# Altium PCB AT89S52单片机入门与提高.PcbDoc (part 3 of 4)
Units mm, origin at the board's own origin, x right, y up, seen from the top; angles counter-clockwise.
Board outline 152.4 x 101.6 mm, 2 copper layers (Top Layer, Bottom Layer); 111 components, 112 nets, 451 pads, 53 vias.
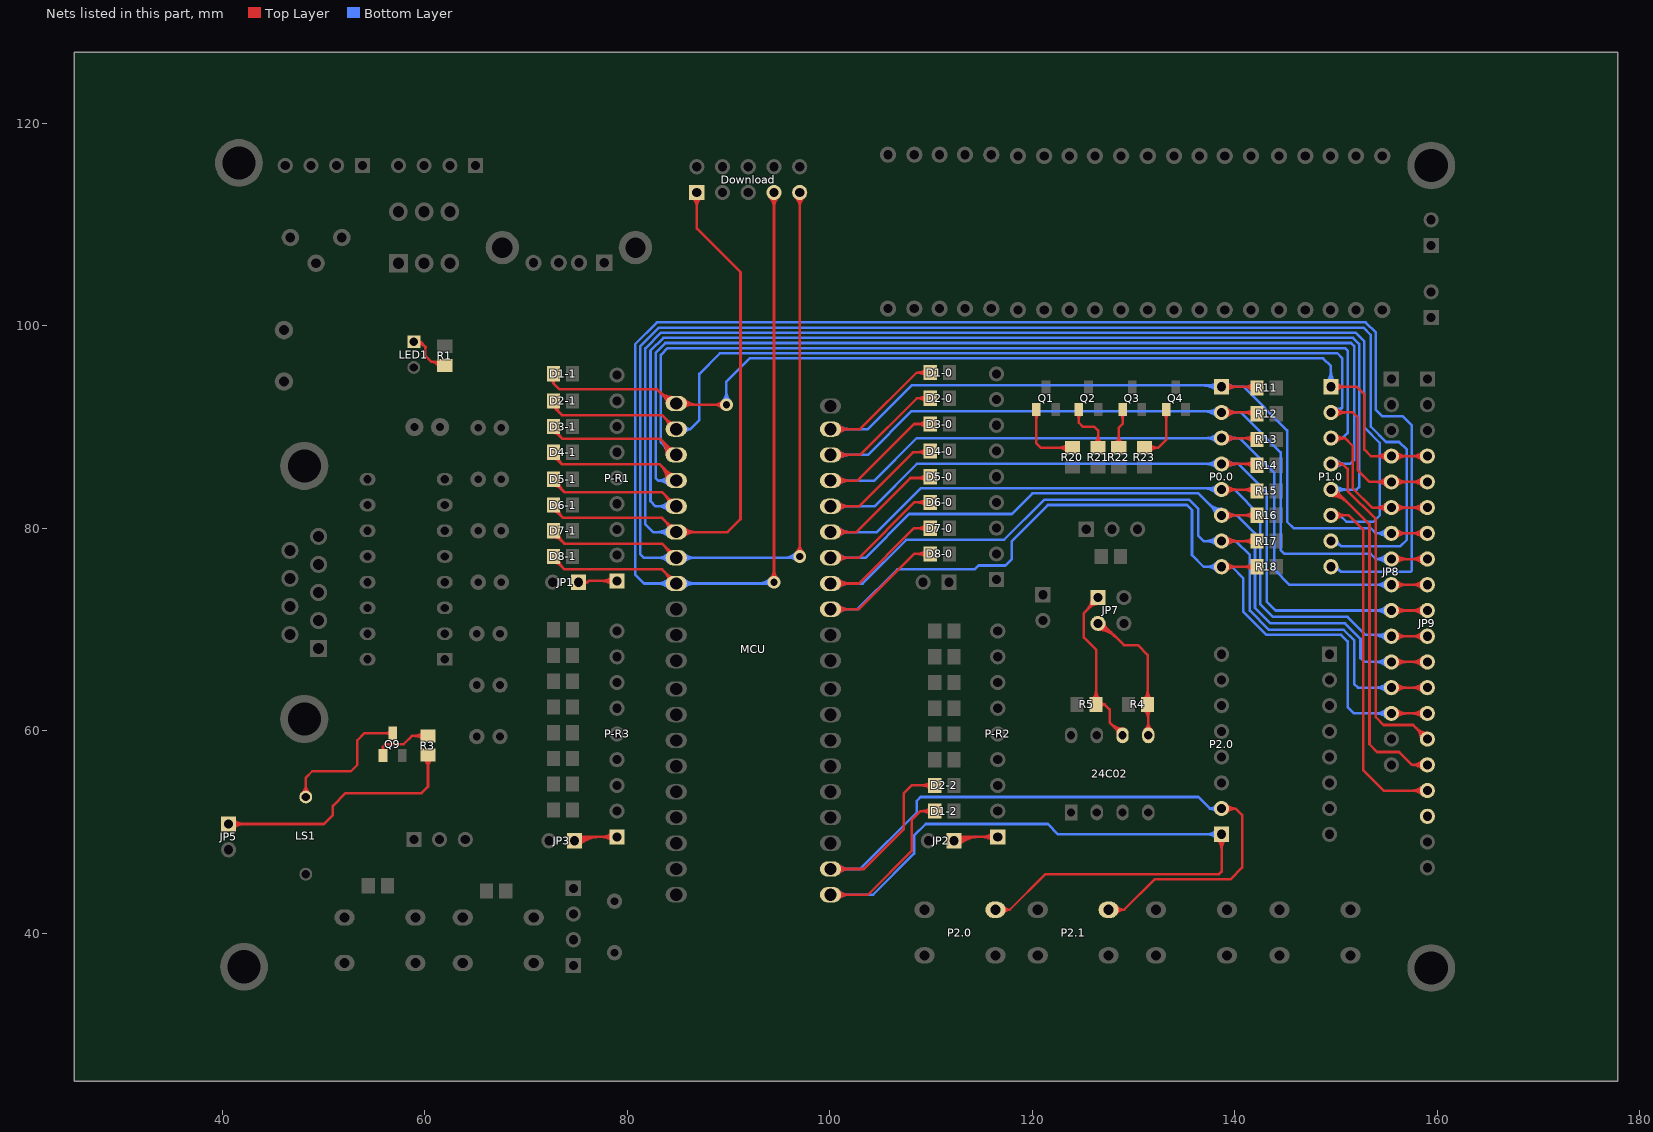
[diagram p3: the nets of this part, all layers, seen from the top]

## Via types
v1: diameter 1.27, hole 0.711, Top Layer to Bottom Layer, 53 vias

## Nets (pads, with @x,y where several pads share a name; then routed paths per layer and width w, separated by ;. In a path a pad name is that pad's centre, name@x,y a point inside that pad or via, vN(x,y) a via of type N, cw(c..) or ccw(c..) an arc to the next point about the centre after c; other vN are vias at no path point) (continued)
NetJP1_1: JP1.1 P-R1.9 | length 8.4
  Top Layer w0.254: JP1.1@75.184,74.676 76.073,74.676 ; JP1.1@75.77,74.463 cw(c76.073,74.353) 76.073,74.676 ; JP1.1@75.77,74.889 ccw(c76.073,74.999) 76.073,74.676 ; P-R1.9@78.553,74.362 ccw(c77.49,73.299) 77.49,74.803 ccw(c77.49,76.307) P-R1.9@78.553,75.244 ; P-R1.9@78.733,74.542 ccw(c78.103,73.912) 78.103,74.803 ccw(c78.103,75.694) P-R1.9@78.733,75.064 ; P-R1.9@78.994,74.803 76.2,74.803 76.073,74.676
NetJP2_1: JP2.1 P-R2.1 | length 13.4
  Top Layer w0.254: JP2.1@112.268,49.149 112.649,49.53 P-R2.1@116.586,49.53 ; JP2.1@112.349,49.068 cw(c113.465,47.952) 113.465,49.53 ; JP2.1@112.529,48.888 cw(c114.079,47.338) 114.079,49.53 ; JP2.1@112.709,48.708 cw(c114.692,46.725) 114.692,49.53 ; P-R2.1@116.145,49.089 ccw(c115.082,48.026) 115.082,49.53 ccw(c115.082,51.034) P-R2.1@116.145,49.971 ; P-R2.1@116.325,49.269 ccw(c115.695,48.639) 115.695,49.53 ccw(c115.695,50.421) P-R2.1@116.325,49.791
NetJP3_1: JP3.1 P-R3.9 | length 13.3
  Top Layer w0.254: JP3.1@74.803,49.149 75.184,49.53 P-R3.9@78.994,49.53 ; JP3.1@74.884,49.068 cw(c76,47.952) 76,49.53 ; JP3.1@75.064,48.888 cw(c76.614,47.338) 76.614,49.53 ; JP3.1@75.244,48.708 cw(c77.227,46.725) 77.227,49.53 ; P-R3.9@78.553,49.089 ccw(c77.49,48.026) 77.49,49.53 ccw(c77.49,51.034) P-R3.9@78.553,49.971 ; P-R3.9@78.733,49.269 ccw(c78.103,48.639) 78.103,49.53 ccw(c78.103,50.421) P-R3.9@78.733,49.791
NetJP6_1: JP5.1 R3.1 | length 30.6
  Top Layer w0.254: JP5.1@40.64,50.8 50.038,50.8 50.927,51.689 50.927,52.578 52.197,53.848 59.69,53.848 60.325,54.483 R3.1@60.325,57.597 ; JP5.1@40.901,50.539 cw(c41.531,49.909) 41.531,50.8 cw(c41.531,51.691) JP5.1@40.901,51.061 ; JP5.1@41.081,50.359 cw(c42.144,49.296) 42.144,50.8 cw(c42.144,52.304) JP5.1@41.081,51.241 ; R3.1@59.955,57.227 cw(c59.062,56.334) 60.325,56.334 cw(c61.588,56.334) R3.1@60.695,57.227
NetJP7_1: 24C02.6 JP7.1 R5.1 | length 25
  Top Layer w0.254: 125.339,71.872 ccw(c124.058,73.152) JP7.1@125.869,73.152 ; 125.645,72.178 cw(c126.492,71.332) JP7.1@126.492,72.529 ; 125.772,72.305 ccw(c124.926,73.152) JP7.1@126.123,73.152 ; R5.1@125.929,63.081 ccw(c125.036,63.974) 126.299,63.974 ccw(c127.562,63.974) R5.1@126.669,63.081 ; JP7.1@126.492,73.152 126.492,73.025 125.095,71.628 125.095,69.215 126.299,68.011 R5.1@126.299,62.611 127.127,62.611 ; R5.1@126.771,62.386 cw(c127.127,62.217) 127.127,62.611 ; R5.1@126.771,62.836 ccw(c127.127,63.005) 127.127,62.611 ; 127.779,60.687 ccw(c128.906,61.814) 24C02.6@128.906,60.22 ; 128.208,60.257 cw(c127.688,59.737) 24C02.6@128.423,59.737 ; 128.212,60.253 ccw(c128.906,60.947) 24C02.6@128.906,59.966 ; 24C02.6@128.906,59.559 127.635,60.83 127.635,62.103 127.127,62.611
NetJP7_3: 24C02.5 JP7.3 R4.1 | length 25.4
  Top Layer w0.254: JP7.3@126.492,69.989 cw(c126.492,67.565) 128.206,69.279 ; JP7.3@126.492,70.243 cw(c126.492,68.432) 127.772,69.713 ; JP7.3@126.492,70.497 cw(c126.492,69.3) 127.339,70.146 ; JP7.3@126.492,70.612 126.873,70.612 129.032,68.453 130.429,68.453 131.379,67.503 R4.1@131.379,62.611 131.446,62.544 24C02.5@131.446,59.559 ; JP7.3@127.115,70.612 ccw(c127.699,70.612) 127.286,70.199 ; R4.1@131.009,62.141 cw(c129.955,61.087) 131.446,61.087 ; R4.1@131.009,63.081 ccw(c130.116,63.974) 131.379,63.974 ccw(c132.642,63.974) R4.1@131.749,63.081 ; 24C02.5@131.105,60.078 ccw(c130.281,60.902) 131.446,60.902 ccw(c132.611,60.902) 24C02.5@131.787,60.078 ; R4.1@131.189,62.321 cw(c130.568,61.7) 131.446,61.7 ; 131.446,61.41 cw(c132.48,61.41) R4.1@131.749,62.141
NetJP9_18: JP9.18
NetLED1_1: LED1.1 R1.2 | length 9.2
  Top Layer w0.254: LED1.1@58.999,98.181 cw(c59.307,97.125) 60.085,97.903 ; 59.782,98.206 ccw(c59.17,97.595) LED1.1@58.928,98.425 59.563,98.425 60.071,97.917 60.071,97.028 60.64,96.459 ; 60.987,96.459 cw(c60.987,95.795) R1.2@61.62,95.996 ; R1.2@61.335,96.459 cw(c61.335,95.906) R1.2@61.862,96.073 ; R1.2@61.378,95.92 ccw(c60.64,95.685) 60.64,96.459 ; R1.2@61.976,96.078 61.595,96.459 60.64,96.459
NetLS1_1: LS1.1 Q9.3 | length 16.8
  Top Layer w0.254: LS1.1@47.901,53.826 ccw(c47.034,54.693) 48.26,54.693 ccw(c49.486,54.693) LS1.1@48.619,53.826 ; LS1.1@48.26,53.467 48.26,55.372 48.895,56.007 52.705,56.007 53.34,56.642 53.34,59.055 54.049,59.764 Q9.3@56.835,59.764 ; Q9.3@56.624,59.553 ccw(c56.115,59.045) 56.115,59.764 ccw(c56.115,60.484) Q9.3@56.624,59.975
NetQ1_1: Q1.1 R20.2 | length 10.2
  Top Layer w0.254: Q1.1@120.19,91.291 cw(c119.681,90.783) 120.401,90.783 cw(c121.12,90.783) Q1.1@120.611,91.291 ; Q1.1@120.401,91.727 120.401,88.387 120.843,87.945 R20.2@123.952,87.945 ; R20.2@123.482,87.575 ccw(c122.589,86.682) 122.589,87.945 ccw(c122.589,89.208) R20.2@123.482,88.315
NetQ2_1: Q2.1 R21.2 | length 8.4
  Top Layer w0.254: Q2.1@124.381,91.291 cw(c123.872,90.783) 124.592,90.783 cw(c125.311,90.783) Q2.1@124.802,91.291 ; Q2.1@124.592,91.727 124.592,90.419 124.968,90.043 126.111,90.043 126.492,89.662 R21.2@126.492,87.945 ; R21.2@126.122,88.315 ccw(c125.229,89.208) 126.492,89.208 ccw(c127.755,89.208) R21.2@126.862,88.315
NetQ3_1: Q3.1 R22.2 | length 7.1
  Top Layer w0.254: R22.2@128.154,88.315 ccw(c127.261,89.208) 128.524,89.208 ccw(c129.787,89.208) R22.2@128.894,88.315 ; R22.2@128.524,87.945 128.524,89.916 128.91,90.302 Q3.1@128.91,91.727 ; Q3.1@128.699,91.291 cw(c128.19,90.783) 128.91,90.783 cw(c129.629,90.783) Q3.1@129.12,91.291
NetQ4_1: Q4.1 R23.2 | length 8.5
  Top Layer w0.254: R23.2@131.064,87.945 132.395,87.945 ; R23.2@131.54,87.582 cw(c132.395,86.758) 132.395,87.945 ; R23.2@131.54,88.308 ccw(c132.395,89.132) 132.395,87.945 ; Q4.1@133.017,91.291 cw(c132.508,90.783) 133.228,90.783 cw(c133.947,90.783) Q4.1@133.438,91.291 ; Q4.1@133.228,91.727 133.228,88.778 132.395,87.945
NetQ9_2: Q9.1 R3.2 | length 7.9
  Top Layer w0.254: Q9.1@56.04,57.564 Q9.1@55.885,57.564 55.885,58.425 56.134,58.674 57.912,58.674 58.735,59.497 R3.2@60.325,59.497 ; R3.2@59.855,59.127 ccw(c58.962,58.234) 58.962,59.497 ccw(c58.962,60.76) R3.2@59.855,59.867
P0.0: D1-0.2 JP8.7 JP9.7 MCU.39 P0.0.1 R11.1 | length 122.1
  Top Layer w0.254: MCU.39@100.072,89.788 102.996,89.788 108.585,95.377 D1-0.2@109.921,95.377 ; MCU.39@100.635,89.525 cw(c101.269,88.891) 101.269,89.788 cw(c101.269,90.685) MCU.39@100.635,90.051 ; MCU.39@100.814,89.346 cw(c101.882,88.278) 101.882,89.788 cw(c101.882,91.298) MCU.39@100.814,90.23 ; D1-0.2@109.551,95.007 ccw(c108.658,94.114) 108.658,95.377 ccw(c108.658,96.64) D1-0.2@109.551,95.747 ; P0.0.1@138.684,93.98 142.052,93.98 R11.1@142.179,93.853 ; P0.0.1@138.945,93.719 cw(c139.575,93.089) 139.575,93.98 cw(c139.575,94.871) P0.0.1@138.945,94.241 ; P0.0.1@139.125,93.539 cw(c140.188,92.476) 140.188,93.98 cw(c140.188,95.484) P0.0.1@139.125,94.421 ; 140.851,93.98 cw(c140.851,92.625) R11.1@141.809,93.583 ; 140.982,93.98 ccw(c140.982,95.15) R11.1@141.809,94.323 ; 141.464,93.98 cw(c141.464,93.238) R11.1@141.989,93.763 ; JP8.7@155.448,79.502 JP9.7@159.004,79.502 ; JP8.7@155.709,79.241 cw(c156.339,78.611) 156.339,79.502 cw(c156.339,80.393) JP8.7@155.709,79.763 ; JP8.7@155.889,79.061 cw(c156.952,77.998) 156.952,79.502 cw(c156.952,81.006) JP8.7@155.889,79.943 ; JP9.7@158.563,79.061 ccw(c157.5,77.998) 157.5,79.502 ccw(c157.5,81.006) JP9.7@158.563,79.943 ; JP9.7@158.743,79.241 ccw(c158.113,78.611) 158.113,79.502 ccw(c158.113,80.393) JP9.7@158.743,79.763
  Bottom Layer w0.254: MCU.39@100.072,89.788 103.758,89.788 108.077,94.107 138.557,94.107 P0.0.1@138.684,93.98 140.843,93.98 145.161,89.662 145.161,80.645 145.796,80.01 153.416,80.01 153.924,79.502 JP8.7@155.448,79.502 ; MCU.39@100.635,89.525 cw(c101.269,88.891) 101.269,89.788 cw(c101.269,90.685) MCU.39@100.635,90.051 ; MCU.39@100.814,89.346 cw(c101.882,88.278) 101.882,89.788 cw(c101.882,91.298) MCU.39@100.814,90.23 ; 136.873,94.107 cw(c136.873,92.169) P0.0.1@138.243,93.539 ; P0.0.1@138.243,94.421 cw(c137.487,95.177) 137.487,94.107 cw(c137.487,92.783) P0.0.1@138.423,93.719 ; P0.0.1@138.945,93.719 cw(c139.575,93.089) 139.575,93.98 cw(c139.575,94.871) P0.0.1@138.945,94.241 ; P0.0.1@139.125,93.539 cw(c140.188,92.476) 140.188,93.98 cw(c140.188,95.484) P0.0.1@139.125,94.421 ; JP8.7@155.007,79.061 ccw(c153.944,77.998) 153.944,79.502 ccw(c153.944,81.006) JP8.7@155.007,79.943 ; JP8.7@155.187,79.241 ccw(c154.557,78.611) 154.557,79.502 ccw(c154.557,80.393) JP8.7@155.187,79.763
P0.1: D2-0.2 JP8.8 JP9.8 MCU.38 P0.0.2 R12.1 | length 122.5
  Top Layer w0.254: MCU.38@100.072,87.248 102.996,87.248 108.585,92.837 D2-0.2@109.921,92.837 ; MCU.38@100.635,86.985 cw(c101.269,86.351) 101.269,87.248 cw(c101.269,88.145) MCU.38@100.635,87.511 ; MCU.38@100.814,86.806 cw(c101.882,85.738) 101.882,87.248 cw(c101.882,88.758) MCU.38@100.814,87.69 ; D2-0.2@109.551,92.467 ccw(c108.658,91.574) 108.658,92.837 ccw(c108.658,94.1) D2-0.2@109.551,93.207 ; P0.0.2@138.684,91.44 142.052,91.44 R12.1@142.179,91.313 ; P0.0.2@138.945,91.179 cw(c139.575,90.549) 139.575,91.44 cw(c139.575,92.331) P0.0.2@138.945,91.701 ; P0.0.2@139.125,90.999 cw(c140.188,89.936) 140.188,91.44 cw(c140.188,92.944) P0.0.2@139.125,91.881 ; 140.851,91.44 cw(c140.851,90.085) R12.1@141.809,91.043 ; 140.982,91.44 ccw(c140.982,92.61) R12.1@141.809,91.783 ; 141.464,91.44 cw(c141.464,90.698) R12.1@141.989,91.223 ; JP8.8@155.448,76.962 JP9.8@159.004,76.962 ; JP8.8@155.709,76.701 cw(c156.339,76.071) 156.339,76.962 cw(c156.339,77.853) JP8.8@155.709,77.223 ; JP8.8@155.889,76.521 cw(c156.952,75.458) 156.952,76.962 cw(c156.952,78.466) JP8.8@155.889,77.403 ; JP9.8@158.563,76.521 ccw(c157.5,75.458) 157.5,76.962 ccw(c157.5,78.466) JP9.8@158.563,77.403 ; JP9.8@158.743,76.701 ccw(c158.113,76.071) 158.113,76.962 ccw(c158.113,77.853) JP9.8@158.743,77.223
  Bottom Layer w0.254: MCU.38@100.072,87.248 103.758,87.248 108.077,91.567 138.557,91.567 P0.0.2@138.684,91.44 140.589,91.44 144.526,87.503 144.526,77.851 144.907,77.47 153.416,77.47 153.924,76.962 JP8.8@155.448,76.962 ; MCU.38@100.635,86.985 cw(c101.269,86.351) 101.269,87.248 cw(c101.269,88.145) MCU.38@100.635,87.511 ; MCU.38@100.814,86.806 cw(c101.882,85.738) 101.882,87.248 cw(c101.882,88.758) MCU.38@100.814,87.69 ; 136.873,91.567 cw(c136.873,89.629) P0.0.2@138.243,90.999 ; P0.0.2@138.243,91.881 cw(c137.487,92.637) 137.487,91.567 cw(c137.487,90.243) P0.0.2@138.423,91.179 ; P0.0.2@138.945,91.179 cw(c139.575,90.549) 139.575,91.44 cw(c139.575,92.331) P0.0.2@138.945,91.701 ; P0.0.2@139.125,90.999 cw(c140.188,89.936) 140.188,91.44 cw(c140.188,92.944) P0.0.2@139.125,91.881 ; JP8.8@155.007,76.521 ccw(c153.944,75.458) 153.944,76.962 ccw(c153.944,78.466) JP8.8@155.007,77.403 ; JP8.8@155.187,76.701 ccw(c154.557,76.071) 154.557,76.962 ccw(c154.557,77.853) JP8.8@155.187,77.223
P0.2: D3-0.2 JP8.9 JP9.9 MCU.37 P0.0.3 R13.1 | length 122.6
  Top Layer w0.254: MCU.37@100.072,84.708 102.742,84.708 108.331,90.297 D3-0.2@109.921,90.297 ; MCU.37@100.635,84.445 cw(c101.269,83.811) 101.269,84.708 cw(c101.269,85.605) MCU.37@100.635,84.971 ; MCU.37@100.814,84.266 cw(c101.882,83.198) 101.882,84.708 cw(c101.882,86.218) MCU.37@100.814,85.15 ; D3-0.2@109.551,89.927 ccw(c108.658,89.034) 108.658,90.297 ccw(c108.658,91.56) D3-0.2@109.551,90.667 ; P0.0.3@138.684,88.9 142.052,88.9 R13.1@142.179,88.773 ; P0.0.3@138.945,88.639 cw(c139.575,88.009) 139.575,88.9 cw(c139.575,89.791) P0.0.3@138.945,89.161 ; P0.0.3@139.125,88.459 cw(c140.188,87.396) 140.188,88.9 cw(c140.188,90.404) P0.0.3@139.125,89.341 ; 140.851,88.9 cw(c140.851,87.545) R13.1@141.809,88.503 ; 140.982,88.9 ccw(c140.982,90.07) R13.1@141.809,89.243 ; 141.464,88.9 cw(c141.464,88.158) R13.1@141.989,88.683 ; JP8.9@155.448,74.422 JP9.9@159.004,74.422 ; JP8.9@155.709,74.161 cw(c156.339,73.531) 156.339,74.422 cw(c156.339,75.313) JP8.9@155.709,74.683 ; JP8.9@155.889,73.981 cw(c156.952,72.918) 156.952,74.422 cw(c156.952,75.926) JP8.9@155.889,74.863 ; JP9.9@158.563,73.981 ccw(c157.5,72.918) 157.5,74.422 ccw(c157.5,75.926) JP9.9@158.563,74.863 ; JP9.9@158.743,74.161 ccw(c158.113,73.531) 158.113,74.422 ccw(c158.113,75.313) JP9.9@158.743,74.683
  Bottom Layer w0.254: MCU.37@100.072,84.708 104.393,84.708 108.585,88.9 140.462,88.9 143.891,85.471 143.891,75.946 145.415,74.422 JP8.9@155.448,74.422 ; MCU.37@100.635,84.445 cw(c101.269,83.811) 101.269,84.708 cw(c101.269,85.605) MCU.37@100.635,84.971 ; MCU.37@100.814,84.266 cw(c101.882,83.198) 101.882,84.708 cw(c101.882,86.218) MCU.37@100.814,85.15 ; P0.0.3@138.243,88.459 ccw(c137.18,87.396) 137.18,88.9 ccw(c137.18,90.404) P0.0.3@138.243,89.341 ; P0.0.3@138.423,88.639 ccw(c137.793,88.009) 137.793,88.9 ccw(c137.793,89.791) P0.0.3@138.423,89.161 ; P0.0.3@138.945,88.639 cw(c139.575,88.009) 139.575,88.9 cw(c139.575,89.791) P0.0.3@138.945,89.161 ; P0.0.3@139.125,88.459 cw(c140.188,87.396) 140.188,88.9 cw(c140.188,90.404) P0.0.3@139.125,89.341 ; JP8.9@155.007,73.981 ccw(c153.944,72.918) 153.944,74.422 ccw(c153.944,75.926) JP8.9@155.007,74.863 ; JP8.9@155.187,74.161 ccw(c154.557,73.531) 154.557,74.422 ccw(c154.557,75.313) JP8.9@155.187,74.683
P0.3: D4-0.2 JP8.10 JP9.10 MCU.36 P0.0.4 R14.1 | length 123.9
  Top Layer w0.254: MCU.36@100.072,82.168 102.869,82.168 108.204,87.503 109.794,87.503 D4-0.2@109.921,87.63 ; MCU.36@100.635,81.905 cw(c101.269,81.271) 101.269,82.168 cw(c101.269,83.065) MCU.36@100.635,82.431 ; MCU.36@100.814,81.726 cw(c101.882,80.658) 101.882,82.168 cw(c101.882,83.678) MCU.36@100.814,82.61 ; 108.593,87.503 ccw(c108.593,88.858) D4-0.2@109.551,87.9 ; 108.724,87.503 cw(c108.724,86.333) D4-0.2@109.551,87.16 ; 109.206,87.503 ccw(c109.206,88.245) D4-0.2@109.731,87.72 ; P0.0.4@138.684,86.36 142.052,86.36 R14.1@142.179,86.233 ; P0.0.4@138.945,86.099 cw(c139.575,85.469) 139.575,86.36 cw(c139.575,87.251) P0.0.4@138.945,86.621 ; P0.0.4@139.125,85.919 cw(c140.188,84.856) 140.188,86.36 cw(c140.188,87.864) P0.0.4@139.125,86.801 ; 140.851,86.36 cw(c140.851,85.005) R14.1@141.809,85.963 ; 140.982,86.36 ccw(c140.982,87.53) R14.1@141.809,86.703 ; 141.464,86.36 cw(c141.464,85.618) R14.1@141.989,86.143 ; JP8.10@155.448,71.882 JP9.10@159.004,71.882 ; JP8.10@155.709,71.621 cw(c156.339,70.991) 156.339,71.882 cw(c156.339,72.773) JP8.10@155.709,72.143 ; JP8.10@155.889,71.441 cw(c156.952,70.378) 156.952,71.882 cw(c156.952,73.386) JP8.10@155.889,72.323 ; JP9.10@158.563,71.441 ccw(c157.5,70.378) 157.5,71.882 ccw(c157.5,73.386) JP9.10@158.563,72.323 ; JP9.10@158.743,71.621 ccw(c158.113,70.991) 158.113,71.882 ccw(c158.113,72.773) JP9.10@158.743,72.143
  Bottom Layer w0.254: MCU.36@100.072,82.168 104.393,82.168 108.585,86.36 140.335,86.36 143.129,83.566 143.129,72.771 144.018,71.882 JP8.10@155.448,71.882 ; MCU.36@100.635,81.905 cw(c101.269,81.271) 101.269,82.168 cw(c101.269,83.065) MCU.36@100.635,82.431 ; MCU.36@100.814,81.726 cw(c101.882,80.658) 101.882,82.168 cw(c101.882,83.678) MCU.36@100.814,82.61 ; P0.0.4@138.243,85.919 ccw(c137.18,84.856) 137.18,86.36 ccw(c137.18,87.864) P0.0.4@138.243,86.801 ; P0.0.4@138.423,86.099 ccw(c137.793,85.469) 137.793,86.36 ccw(c137.793,87.251) P0.0.4@138.423,86.621 ; P0.0.4@138.945,86.099 cw(c139.575,85.469) 139.575,86.36 cw(c139.575,87.251) P0.0.4@138.945,86.621 ; P0.0.4@139.125,85.919 cw(c140.188,84.856) 140.188,86.36 cw(c140.188,87.864) P0.0.4@139.125,86.801 ; JP8.10@155.007,71.441 ccw(c153.944,70.378) 153.944,71.882 ccw(c153.944,73.386) JP8.10@155.007,72.323 ; JP8.10@155.187,71.621 ccw(c154.557,70.991) 154.557,71.882 ccw(c154.557,72.773) JP8.10@155.187,72.143
P0.4: D5-0.2 JP8.11 JP9.11 MCU.35 P0.0.5 R15.1 | length 121.2
  Top Layer w0.254: MCU.35@100.072,79.628 102.615,79.628 107.95,84.963 109.794,84.963 D5-0.2@109.921,85.09 ; MCU.35@100.635,79.365 cw(c101.269,78.731) 101.269,79.628 cw(c101.269,80.525) MCU.35@100.635,79.891 ; MCU.35@100.814,79.186 cw(c101.882,78.118) 101.882,79.628 cw(c101.882,81.138) MCU.35@100.814,80.07 ; 108.593,84.963 ccw(c108.593,86.318) D5-0.2@109.551,85.36 ; 108.724,84.963 cw(c108.724,83.793) D5-0.2@109.551,84.62 ; 109.206,84.963 ccw(c109.206,85.705) D5-0.2@109.731,85.18 ; P0.0.5@138.684,83.82 142.052,83.82 R15.1@142.179,83.693 ; P0.0.5@138.945,83.559 cw(c139.575,82.929) 139.575,83.82 cw(c139.575,84.711) P0.0.5@138.945,84.081 ; P0.0.5@139.125,83.379 cw(c140.188,82.316) 140.188,83.82 cw(c140.188,85.324) P0.0.5@139.125,84.261 ; 140.851,83.82 cw(c140.851,82.465) R15.1@141.809,83.423 ; 140.982,83.82 ccw(c140.982,84.99) R15.1@141.809,84.163 ; 141.464,83.82 cw(c141.464,83.078) R15.1@141.989,83.603 ; JP8.11@155.448,69.342 JP9.11@159.004,69.342 ; JP8.11@155.709,69.081 cw(c156.339,68.451) 156.339,69.342 cw(c156.339,70.233) JP8.11@155.709,69.603 ; JP8.11@155.889,68.901 cw(c156.952,67.838) 156.952,69.342 cw(c156.952,70.846) JP8.11@155.889,69.783 ; JP9.11@158.563,68.901 ccw(c157.5,67.838) 157.5,69.342 ccw(c157.5,70.846) JP9.11@158.563,69.783 ; JP9.11@158.743,69.081 ccw(c158.113,68.451) 158.113,69.342 ccw(c158.113,70.233) JP9.11@158.743,69.603
  Bottom Layer w0.254: MCU.35@100.072,79.628 104.647,79.628 108.966,83.947 138.557,83.947 P0.0.5@138.684,83.82 139.954,83.82 ; MCU.35@100.635,79.365 cw(c101.269,78.731) 101.269,79.628 cw(c101.269,80.525) MCU.35@100.635,79.891 ; MCU.35@100.814,79.186 cw(c101.882,78.118) 101.882,79.628 cw(c101.882,81.138) MCU.35@100.814,80.07 ; 136.873,83.947 cw(c136.873,82.009) P0.0.5@138.243,83.379 ; P0.0.5@138.243,84.261 cw(c137.487,85.017) 137.487,83.947 cw(c137.487,82.623) P0.0.5@138.423,83.559 ; P0.0.5@138.976,83.594 cw(c139.436,83.238) 139.436,83.82 cw(c139.436,84.402) P0.0.5@138.976,84.046 ; P0.0.5@139.177,83.439 cw(c139.954,82.837) 139.954,83.82 ; P0.0.5@139.177,84.201 ccw(c139.954,84.803) 139.954,83.82 ; 153.637,69.469 cw(c153.637,67.531) JP8.11@155.007,68.901 ; JP8.11@155.007,69.783 cw(c154.251,70.539) 154.251,69.469 cw(c154.251,68.145) JP8.11@155.187,69.081 ; JP8.11@155.448,69.342 155.321,69.469 152.908,69.469 151.13,71.247 143.764,71.247 142.494,72.517 142.494,81.28 139.954,83.82
P0.5: D6-0.2 JP8.12 JP9.12 MCU.34 P0.0.6 R16.1 | length 123.3
  Top Layer w0.254: MCU.34@100.072,77.088 102.869,77.088 108.331,82.55 D6-0.2@109.921,82.55 ; MCU.34@100.635,76.825 cw(c101.269,76.191) 101.269,77.088 cw(c101.269,77.985) MCU.34@100.635,77.351 ; MCU.34@100.814,76.646 cw(c101.882,75.578) 101.882,77.088 cw(c101.882,78.598) MCU.34@100.814,77.53 ; D6-0.2@109.551,82.18 ccw(c108.658,81.287) 108.658,82.55 ccw(c108.658,83.813) D6-0.2@109.551,82.92 ; P0.0.6@138.684,81.28 R16.1@142.179,81.28 ; P0.0.6@138.945,81.019 cw(c139.575,80.389) 139.575,81.28 cw(c139.575,82.171) P0.0.6@138.945,81.541 ; P0.0.6@139.125,80.839 cw(c140.188,79.776) 140.188,81.28 cw(c140.188,82.784) P0.0.6@139.125,81.721 ; R16.1@141.809,80.91 ccw(c140.916,80.017) 140.916,81.28 ccw(c140.916,82.543) R16.1@141.809,81.65 ; JP8.12@155.448,66.802 JP9.12@159.004,66.802 ; JP8.12@155.709,66.541 cw(c156.339,65.911) 156.339,66.802 cw(c156.339,67.693) JP8.12@155.709,67.063 ; JP8.12@155.889,66.361 cw(c156.952,65.298) 156.952,66.802 cw(c156.952,68.306) JP8.12@155.889,67.243 ; JP9.12@158.563,66.361 ccw(c157.5,65.298) 157.5,66.802 ccw(c157.5,68.306) JP9.12@158.563,67.243 ; JP9.12@158.743,66.541 ccw(c158.113,65.911) 158.113,66.802 ccw(c158.113,67.693) JP9.12@158.743,67.063
  Bottom Layer w0.254: MCU.34@100.072,77.088 103.504,77.088 107.823,81.407 117.983,81.407 120.015,83.439 136.398,83.439 138.557,81.28 140.208,81.28 141.986,79.502 141.986,72.136 143.51,70.612 150.876,70.612 152.4,69.088 152.4,67.183 152.781,66.802 JP8.12@155.448,66.802 ; MCU.34@100.635,76.825 cw(c101.269,76.191) 101.269,77.088 cw(c101.269,77.985) MCU.34@100.635,77.351 ; MCU.34@100.814,76.646 cw(c101.882,75.578) 101.882,77.088 cw(c101.882,78.598) MCU.34@100.814,77.53 ; 137.404,82.433 ccw(c138.684,83.714) P0.0.6@138.684,81.903 ; 137.71,82.127 cw(c136.864,81.28) P0.0.6@138.061,81.28 ; 137.837,82 ccw(c138.684,82.846) P0.0.6@138.684,81.649 ; P0.0.6@138.557,81.407 P0.0.6@138.684,81.28 ; P0.0.6@138.945,81.019 cw(c139.575,80.389) 139.575,81.28 cw(c139.575,82.171) P0.0.6@138.945,81.541 ; P0.0.6@139.125,80.839 cw(c140.188,79.776) 140.188,81.28 cw(c140.188,82.784) P0.0.6@139.125,81.721 ; JP8.12@155.007,66.361 ccw(c153.944,65.298) 153.944,66.802 ccw(c153.944,68.306) JP8.12@155.007,67.243 ; JP8.12@155.187,66.541 ccw(c154.557,65.911) 154.557,66.802 ccw(c154.557,67.693) JP8.12@155.187,67.063
P0.6: D7-0.2 JP8.13 JP9.13 MCU.33 P0.0.7 R17.1 | length 126.6
  Top Layer w0.254: MCU.33@100.072,74.548 102.869,74.548 108.331,80.01 D7-0.2@109.921,80.01 ; MCU.33@100.635,74.285 cw(c101.269,73.651) 101.269,74.548 cw(c101.269,75.445) MCU.33@100.635,74.811 ; MCU.33@100.814,74.106 cw(c101.882,73.038) 101.882,74.548 cw(c101.882,76.058) MCU.33@100.814,74.99 ; D7-0.2@109.551,79.64 ccw(c108.658,78.747) 108.658,80.01 ccw(c108.658,81.273) D7-0.2@109.551,80.38 ; P0.0.7@138.684,78.74 R17.1@142.179,78.74 ; P0.0.7@138.945,78.479 cw(c139.575,77.849) 139.575,78.74 cw(c139.575,79.631) P0.0.7@138.945,79.001 ; P0.0.7@139.125,78.299 cw(c140.188,77.236) 140.188,78.74 cw(c140.188,80.244) P0.0.7@139.125,79.181 ; R17.1@141.809,78.37 ccw(c140.916,77.477) 140.916,78.74 ccw(c140.916,80.003) R17.1@141.809,79.11 ; JP8.13@155.448,64.262 JP9.13@159.004,64.262 ; JP8.13@155.709,64.001 cw(c156.339,63.371) 156.339,64.262 cw(c156.339,65.153) JP8.13@155.709,64.523 ; JP8.13@155.889,63.821 cw(c156.952,62.758) 156.952,64.262 cw(c156.952,65.766) JP8.13@155.889,64.703 ; JP9.13@158.563,63.821 ccw(c157.5,62.758) 157.5,64.262 ccw(c157.5,65.766) JP9.13@158.563,64.703 ; JP9.13@158.743,64.001 ccw(c158.113,63.371) 158.113,64.262 ccw(c158.113,65.153) JP9.13@158.743,64.523
  Bottom Layer w0.254: MCU.33@100.072,74.548 103.25,74.548 107.569,78.867 117.221,78.867 121.158,82.804 135.509,82.804 136.398,81.915 136.398,79.248 136.906,78.74 140.081,78.74 ; MCU.33@100.635,74.285 cw(c101.269,73.651) 101.269,74.548 cw(c101.269,75.445) MCU.33@100.635,74.811 ; MCU.33@100.814,74.106 cw(c101.882,73.038) 101.882,74.548 cw(c101.882,76.058) MCU.33@100.814,74.99 ; P0.0.7@138.243,78.299 ccw(c137.18,77.236) 137.18,78.74 ccw(c137.18,80.244) P0.0.7@138.243,79.181 ; P0.0.7@138.423,78.479 ccw(c137.793,77.849) 137.793,78.74 ccw(c137.793,79.631) P0.0.7@138.423,79.001 ; P0.0.7@138.959,78.493 cw(c139.511,77.997) 139.511,78.74 cw(c139.511,79.483) P0.0.7@138.959,78.987 ; P0.0.7@139.148,78.324 cw(c140.081,77.485) 140.081,78.74 ; P0.0.7@139.148,79.156 ccw(c140.081,79.995) 140.081,78.74 ; JP8.13@155.007,63.821 ccw(c153.944,62.758) 153.944,64.262 ccw(c153.944,65.766) JP8.13@155.007,64.703 ; JP8.13@155.187,64.001 ccw(c154.557,63.371) 154.557,64.262 ccw(c154.557,65.153) JP8.13@155.187,64.523 ; JP8.13@155.448,64.262 152.146,64.262 151.765,64.643 151.765,68.961 150.749,69.977 143.383,69.977 141.478,71.882 141.478,77.343 140.081,78.74
P0.7: D8-0.2 JP8.14 JP9.14 MCU.32 P0.0.8 R18.1 | length 128.2
  Top Layer w0.254: MCU.32@100.072,72.008 102.869,72.008 108.331,77.47 D8-0.2@109.921,77.47 ; MCU.32@100.635,71.745 cw(c101.269,71.111) 101.269,72.008 cw(c101.269,72.905) MCU.32@100.635,72.271 ; MCU.32@100.814,71.566 cw(c101.882,70.498) 101.882,72.008 cw(c101.882,73.518) MCU.32@100.814,72.45 ; D8-0.2@109.551,77.1 ccw(c108.658,76.207) 108.658,77.47 ccw(c108.658,78.733) D8-0.2@109.551,77.84 ; P0.0.8@138.684,76.2 R18.1@142.179,76.2 ; P0.0.8@138.945,75.939 cw(c139.575,75.309) 139.575,76.2 cw(c139.575,77.091) P0.0.8@138.945,76.461 ; P0.0.8@139.125,75.759 cw(c140.188,74.696) 140.188,76.2 cw(c140.188,77.704) P0.0.8@139.125,76.641 ; R18.1@141.809,75.83 ccw(c140.916,74.937) 140.916,76.2 ccw(c140.916,77.463) R18.1@141.809,76.57 ; JP8.14@155.448,61.722 JP9.14@159.004,61.722 ; JP8.14@155.709,61.461 cw(c156.339,60.831) 156.339,61.722 cw(c156.339,62.613) JP8.14@155.709,61.983 ; JP8.14@155.889,61.281 cw(c156.952,60.218) 156.952,61.722 cw(c156.952,63.226) JP8.14@155.889,62.163 ; JP9.14@158.563,61.281 ccw(c157.5,60.218) 157.5,61.722 ccw(c157.5,63.226) JP9.14@158.563,62.163 ; JP9.14@158.743,61.461 ccw(c158.113,60.831) 158.113,61.722 ccw(c158.113,62.613) JP9.14@158.743,61.983
  Bottom Layer w0.254: MCU.32@100.072,72.008 102.742,72.008 106.68,75.946 114.3,75.946 114.681,76.327 117.348,76.327 117.983,76.962 117.983,78.74 121.539,82.296 135.255,82.296 135.763,81.788 135.763,77.343 136.906,76.2 139.7,76.2 ; MCU.32@100.635,71.745 cw(c101.269,71.111) 101.269,72.008 cw(c101.269,72.905) MCU.32@100.635,72.271 ; MCU.32@100.814,71.566 cw(c101.882,70.498) 101.882,72.008 cw(c101.882,73.518) MCU.32@100.814,72.45 ; P0.0.8@138.243,75.759 ccw(c137.18,74.696) 137.18,76.2 ccw(c137.18,77.704) P0.0.8@138.243,76.641 ; P0.0.8@138.423,75.939 ccw(c137.793,75.309) 137.793,76.2 ccw(c137.793,77.091) P0.0.8@138.423,76.461 ; P0.0.8@139.239,75.917 cw(c139.7,75.683) 139.7,76.2 ; P0.0.8@139.239,76.483 ccw(c139.7,76.717) 139.7,76.2 ; JP8.14@155.007,61.281 ccw(c153.944,60.218) 153.944,61.722 ccw(c153.944,63.226) JP8.14@155.007,62.163 ; JP8.14@155.187,61.461 ccw(c154.557,60.831) 154.557,61.722 ccw(c154.557,62.613) JP8.14@155.187,61.983 ; JP8.14@155.448,61.722 151.765,61.722 151.13,62.357 151.13,68.834 150.495,69.469 143.129,69.469 140.843,71.755 140.843,75.057 139.7,76.2
P1.0: D1-1.2 JP8.4 JP9.4 MCU.1 P1.0.1 | length 130.2
  Top Layer w0.254: D1-1.2@72.474,94.683 cw(c72.281,94.3) 72.71,94.3 ; D1-1.2@72.71,95.25 72.71,94.3 ; D1-1.2@72.946,94.683 ccw(c73.139,94.3) 72.71,94.3 ; 83.118,93.539 ccw(c84.532,94.954) MCU.1@84.532,92.953 ; 83.551,93.106 ccw(c84.532,94.087) MCU.1@84.532,92.699 ; 83.608,93.049 cw(c82.887,92.328) MCU.1@83.907,92.328 ; MCU.1@85.395,92.591 ccw(c86.333,93.529) 86.333,92.202 ; MCU.1@85.574,91.886 cw(c86.338,91.122) 86.338,92.202 ; MCU.1@85.574,92.77 ccw(c86.946,94.142) 86.946,92.202 ; v1@89.43,91.843 ccw(c88.563,90.976) 88.563,92.202 ccw(c88.563,93.428) v1@89.43,92.561 ; v1(89.789,92.202) 84.958,92.202 84.704,92.456 84.201,92.456 82.943,93.714 73.296,93.714 72.71,94.3 ; P1.0.1@149.479,93.98 152.019,93.98 152.781,93.218 152.781,87.757 153.416,87.122 JP9.4@159.004,87.122 ; P1.0.1@149.74,93.719 cw(c150.37,93.089) 150.37,93.98 cw(c150.37,94.871) P1.0.1@149.74,94.241 ; P1.0.1@149.92,93.539 cw(c150.983,92.476) 150.983,93.98 cw(c150.983,95.484) P1.0.1@149.92,94.421 ; JP8.4@155.007,86.681 ccw(c153.944,85.618) 153.944,87.122 ccw(c153.944,88.626) JP8.4@155.007,87.563 ; JP8.4@155.187,86.861 ccw(c154.557,86.231) 154.557,87.122 ccw(c154.557,88.013) JP8.4@155.187,87.383 ; JP8.4@155.709,86.861 cw(c156.339,86.231) 156.339,87.122 cw(c156.339,88.013) JP8.4@155.709,87.383 ; JP8.4@155.889,86.681 cw(c156.952,85.618) 156.952,87.122 cw(c156.952,88.626) JP8.4@155.889,87.563 ; JP9.4@158.563,86.681 ccw(c157.5,85.618) 157.5,87.122 ccw(c157.5,88.626) JP9.4@158.563,87.563 ; JP9.4@158.743,86.861 ccw(c158.113,86.231) 158.113,87.122 ccw(c158.113,88.013) JP9.4@158.743,87.383
  Bottom Layer w0.254: v1@89.43,92.561 ccw(c88.563,93.428) 89.789,93.428 ccw(c91.015,93.428) v1@90.148,92.561 ; v1(89.789,92.202) 89.789,94.488 92.075,96.774 148.717,96.774 149.479,96.012 P1.0.1@149.479,93.98 ; P1.0.1@149.038,94.421 ccw(c147.975,95.484) 149.479,95.484 ccw(c150.983,95.484) P1.0.1@149.92,94.421 ; P1.0.1@149.218,94.241 ccw(c148.588,94.871) 149.479,94.871 ccw(c150.37,94.871) P1.0.1@149.74,94.241
P1.1: D2-1.2 JP8.5 JP9.5 MCU.2 P1.0.2 | length 130
  Top Layer w0.254: D2-1.2@72.71,92.583 72.71,92.009 73.545,91.174 83.446,91.174 MCU.2@84.832,89.788 ; D2-1.2@72.95,92.361 ccw(c73.489,92.086) 73.061,91.658 ; D2-1.2@73.176,92.245 ccw(c73.816,91.919) 73.308,91.411 ; 83.717,90.904 cw(c82.643,89.83) MCU.2@84.161,89.796 ; 83.977,90.643 ccw(c84.532,91.199) MCU.2@84.532,90.413 ; 84.137,90.483 cw(c83.465,89.812) MCU.2@84.415,89.791 ; P1.0.2@149.479,91.44 151.638,91.44 152.146,90.932 152.146,85.725 153.289,84.582 JP9.5@159.004,84.582 ; P1.0.2@149.74,91.179 cw(c150.37,90.549) 150.37,91.44 cw(c150.37,92.331) P1.0.2@149.74,91.701 ; P1.0.2@149.92,90.999 cw(c150.983,89.936) 150.983,91.44 cw(c150.983,92.944) P1.0.2@149.92,91.881 ; JP8.5@155.007,84.141 ccw(c153.944,83.078) 153.944,84.582 ccw(c153.944,86.086) JP8.5@155.007,85.023 ; JP8.5@155.187,84.321 ccw(c154.557,83.691) 154.557,84.582 ccw(c154.557,85.473) JP8.5@155.187,84.843 ; JP8.5@155.709,84.321 cw(c156.339,83.691) 156.339,84.582 cw(c156.339,85.473) JP8.5@155.709,84.843 ; JP8.5@155.889,84.141 cw(c156.952,83.078) 156.952,84.582 cw(c156.952,86.086) JP8.5@155.889,85.023 ; JP9.5@158.563,84.141 ccw(c157.5,83.078) 157.5,84.582 ccw(c157.5,86.086) JP9.5@158.563,85.023 ; JP9.5@158.743,84.321 ccw(c158.113,83.691) 158.113,84.582 ccw(c158.113,85.473) JP9.5@158.743,84.843
  Bottom Layer w0.254: MCU.2@84.832,89.788 86.232,89.788 ; MCU.2@85.67,89.468 cw(c86.232,89.134) 86.232,89.788 ; MCU.2@85.67,90.108 ccw(c86.232,90.442) 86.232,89.788 ; P1.0.2@149.479,91.44 150.114,91.44 150.622,91.948 ; P1.0.2@149.553,91.528 ccw(c149.876,91.911) 150.231,91.557 ; P1.0.2@149.717,91.722 ccw(c150.055,92.124) 150.426,91.752 ; P1.0.2@149.88,91.916 ccw(c150.234,92.336) 150.622,91.948 ; 86.232,89.788 87.122,90.678 87.122,95.25 89.154,97.282 150.114,97.282 150.622,96.774 150.622,91.948
P1.2: D3-1.2 JP8.6 JP9.6 MCU.3 P1.0.3 | length 143.6
  Top Layer w0.254: D3-1.2@72.71,89.42 cw(c72.71,88.688) 73.227,89.206 ; D3-1.2@72.71,90.043 72.71,89.723 73.579,88.854 83.226,88.854 MCU.3@84.832,87.248 ; D3-1.2@72.972,89.883 ccw(c73.596,89.742) 73.144,89.289 ; D3-1.2@73.22,89.827 ccw(c74.126,89.621) 73.469,88.964 ; 83.252,88.828 cw(c81.673,87.248) MCU.3@83.907,87.248 ; 83.686,88.394 cw(c82.54,87.248) MCU.3@84.161,87.248 ; 83.977,88.103 ccw(c84.532,88.659) MCU.3@84.532,87.873 ; 84.12,87.961 cw(c83.407,87.248) MCU.3@84.415,87.248 ; P1.0.3@149.479,88.9 150.876,88.9 ; P1.0.3@149.754,88.653 cw(c150.306,88.157) 150.306,88.9 cw(c150.306,89.643) P1.0.3@149.754,89.147 ; P1.0.3@149.943,88.484 cw(c150.876,87.645) 150.876,88.9 ; P1.0.3@149.943,89.316 ccw(c150.876,90.155) 150.876,88.9 ; JP8.6@155.007,81.601 ccw(c153.944,80.538) 153.944,82.042 ccw(c153.944,83.546) JP8.6@155.007,82.483 ; JP8.6@155.187,81.781 ccw(c154.557,81.151) 154.557,82.042 ccw(c154.557,82.933) JP8.6@155.187,82.303 ; JP8.6@155.709,81.781 cw(c156.339,81.151) 156.339,82.042 cw(c156.339,82.933) JP8.6@155.709,82.303 ; JP8.6@155.889,81.601 cw(c156.952,80.538) 156.952,82.042 cw(c156.952,83.546) JP8.6@155.889,82.483 ; JP9.6@158.563,81.601 ccw(c157.5,80.538) 157.5,82.042 ccw(c157.5,83.546) JP9.6@158.563,82.483 ; JP9.6@158.743,81.781 ccw(c158.113,81.151) 158.113,82.042 ccw(c158.113,82.933) JP9.6@158.743,82.303 ; JP9.6@159.004,82.042 153.543,82.042 151.638,83.947 151.638,88.138 150.876,88.9
  Bottom Layer w0.254: 83.429,88.402 cw(c82.274,87.248) MCU.3@83.907,87.248 ; 83.551,88.28 ccw(c84.532,89.261) MCU.3@84.532,87.873 ; 83.862,87.969 cw(c83.141,87.248) MCU.3@84.161,87.248 ; 83.985,87.846 ccw(c84.532,88.393) MCU.3@84.532,87.619 ; MCU.3@84.832,87.248 84.583,87.248 83.312,88.519 83.312,97.119 83.983,97.79 150.876,97.79 151.13,97.536 151.13,89.408 150.622,88.9 ; P1.0.3@149.479,88.9 150.622,88.9 ; P1.0.3@150.003,88.562 cw(c150.622,88.163) 150.622,88.9 ; P1.0.3@150.003,89.238 ccw(c150.622,89.637) 150.622,88.9
P1.3: D4-1.2 JP9.15 MCU.4 P1.0.4 | length 163.9
  Top Layer w0.254: D4-1.2@72.71,86.88 cw(c72.71,86.148) 73.227,86.666 ; D4-1.2@72.71,87.503 72.71,87.183 73.579,86.314 83.226,86.314 MCU.4@84.832,84.708 ; D4-1.2@72.972,87.343 ccw(c73.596,87.202) 73.144,86.749 ; D4-1.2@73.22,87.287 ccw(c74.126,87.081) 73.469,86.424 ; 83.252,86.288 cw(c81.673,84.708) MCU.4@83.907,84.708 ; 83.686,85.854 cw(c82.54,84.708) MCU.4@84.161,84.708 ; 83.977,85.563 ccw(c84.532,86.119) MCU.4@84.532,85.333 ; 84.12,85.421 cw(c83.407,84.708) MCU.4@84.415,84.708 ; P1.0.4@149.479,86.36 150.622,86.36 ; P1.0.4@150.003,86.022 cw(c150.622,85.623) 150.622,86.36 ; P1.0.4@150.003,86.698 ccw(c150.622,87.097) 150.622,86.36 ; JP9.15@158.381,59.182 ccw(c156.877,59.182) 157.94,60.246 ccw(c159.004,61.309) JP9.15@159.004,59.805 ; JP9.15@158.635,59.182 ccw(c157.744,59.182) 158.374,59.812 ccw(c159.004,60.442) JP9.15@159.004,59.551 ; JP9.15@159.004,59.182 157.607,60.579 154.686,60.579 153.924,61.341 153.924,80.899 151.13,83.693 151.13,85.852 150.622,86.36
  Bottom Layer w0.254: MCU.4@84.082,84.274 ccw(c83.059,83.286) 83.059,84.708 ; MCU.4@84.082,85.142 cw(c83.059,86.13) 83.059,84.708 ; MCU.4@84.265,84.45 ccw(c83.657,83.863) 83.657,84.708 ccw(c83.657,85.553) MCU.4@84.265,84.966 ; MCU.4@84.832,84.708 83.059,84.708 ; P1.0.4@149.479,86.36 151.384,86.36 151.765,86.741 151.765,98.004 151.471,98.298 83.773,98.298 82.804,97.329 82.804,84.963 83.059,84.708 ; P1.0.4@149.74,86.099 cw(c150.37,85.469) 150.37,86.36 cw(c150.37,87.251) P1.0.4@149.74,86.621 ; P1.0.4@149.92,85.919 cw(c150.983,84.856) 150.983,86.36 cw(c150.983,87.864) P1.0.4@149.92,86.801
P1.4: D5-1.2 JP9.16 MCU.5 P1.0.5 | length 173.7
  Top Layer w0.254: D5-1.2@72.71,84.213 cw(c72.71,83.175) 73.444,83.909 ; D5-1.2@72.71,84.836 72.71,84.643 73.787,83.566 83.434,83.566 MCU.5@84.832,82.168 ; D5-1.2@72.979,84.736 ccw(c73.853,84.736) D5-1.2@73.235,84.118 ; D5-1.2@73.233,84.736 ccw(c74.72,84.736) 73.669,83.684 ; 83.708,83.292 cw(c82.615,82.199) MCU.5@84.161,82.174 ; 83.977,83.023 ccw(c84.532,83.579) MCU.5@84.532,82.793 ; 84.132,82.868 cw(c83.45,82.185) MCU.5@84.415,82.17 ; P1.0.5@149.352,83.947 149.733,83.947 153.289,80.391 153.289,58.674 154.051,57.912 156.21,57.912 157.48,56.642 JP9.16@159.004,56.642 ; P1.0.5@149.479,83.197 cw(c149.479,80.773) 151.193,82.487 ; P1.0.5@149.479,83.451 cw(c149.479,81.64) 150.759,82.921 ; P1.0.5@149.479,83.705 cw(c149.479,82.508) 150.326,83.354 ; P1.0.5@150.102,83.82 ccw(c150.686,83.82) 150.273,83.407 ; JP9.16@158.563,56.201 ccw(c157.5,55.138) 157.5,56.642 ccw(c157.5,58.146) JP9.16@158.563,57.083 ; JP9.16@158.743,56.381 ccw(c158.113,55.751) 158.113,56.642 ccw(c158.113,57.533) JP9.16@158.743,56.903
  Bottom Layer w0.254: MCU.5@84.09,81.726 ccw(c83.022,80.658) 83.022,82.168 ccw(c83.022,83.678) MCU.5@84.09,82.61 ; MCU.5@84.27,81.905 ccw(c83.636,81.271) 83.636,82.168 ccw(c83.636,83.065) MCU.5@84.27,82.431 ; MCU.5@84.832,82.168 82.805,82.168 82.296,82.677 82.296,97.54 83.562,98.806 151.682,98.806 152.273,98.215 152.273,84.074 152.019,83.82 P1.0.5@149.479,83.82 ; P1.0.5@149.74,83.559 cw(c150.37,82.929) 150.37,83.82 cw(c150.37,84.711) P1.0.5@149.74,84.081 ; P1.0.5@149.92,83.379 cw(c150.983,82.316) 150.983,83.82 cw(c150.983,85.324) P1.0.5@149.92,84.261
P1.5: D6-1.2 Download.1 JP9.17 MCU.6 P1.0.6 | length 229.5
  Top Layer w0.254: D6-1.2@72.71,81.673 cw(c72.71,80.941) 73.227,81.459 ; D6-1.2@72.71,82.296 72.71,81.976 73.66,81.026 83.434,81.026 MCU.6@84.832,79.628 89.915,79.628 91.186,80.899 91.186,105.283 86.868,109.601 Download.1@86.868,113.157 ; D6-1.2@72.976,82.156 ccw(c73.743,82.04) 73.194,81.492 ; D6-1.2@73.227,82.118 ccw(c74.36,81.947) 73.55,81.136 ; 83.708,80.752 cw(c82.615,79.659) MCU.6@84.161,79.634 ; 83.977,80.483 ccw(c84.532,81.039) MCU.6@84.532,80.253 ; 84.132,80.328 cw(c83.45,79.645) MCU.6@84.415,79.63 ; MCU.6@85.395,79.365 cw(c86.029,78.731) 86.029,79.628 cw(c86.029,80.525) MCU.6@85.395,79.891 ; MCU.6@85.574,79.186 cw(c86.642,78.118) 86.642,79.628 cw(c86.642,81.138) MCU.6@85.574,80.07 ; Download.1@86.427,112.716 cw(c85.364,111.653) 86.868,111.653 cw(c88.372,111.653) Download.1@87.309,112.716 ; Download.1@86.607,112.896 cw(c85.977,112.266) 86.868,112.266 cw(c87.759,112.266) Download.1@87.129,112.896 ; P1.0.6@149.479,81.28 151.257,81.28 152.654,79.883 152.654,56.134 154.686,54.102 JP9.17@159.004,54.102 ; P1.0.6@149.74,81.019 cw(c150.37,80.389) 150.37,81.28 cw(c150.37,82.171) P1.0.6@149.74,81.541 ; P1.0.6@149.92,80.839 cw(c150.983,79.776) 150.983,81.28 cw(c150.983,82.784) P1.0.6@149.92,81.721 ; JP9.17@158.563,53.661 ccw(c157.5,52.598) 157.5,54.102 ccw(c157.5,55.606) JP9.17@158.563,54.543 ; JP9.17@158.743,53.841 ccw(c158.113,53.211) 158.113,54.102 ccw(c158.113,54.993) JP9.17@158.743,54.363
  Bottom Layer w0.254: MCU.6@84.09,79.186 ccw(c83.022,78.118) 83.022,79.628 ccw(c83.022,81.138) MCU.6@84.09,80.07 ; MCU.6@84.27,79.365 ccw(c83.636,78.731) 83.636,79.628 ccw(c83.636,80.525) MCU.6@84.27,79.891 ; MCU.6@84.832,79.628 82.551,79.628 81.788,80.391 81.788,97.75 83.352,99.314 151.892,99.314 152.781,98.425 152.781,89.96 154.305,88.436 154.305,81.28 153.67,80.645 151.003,80.645 150.368,81.28 ; P1.0.6@149.479,81.28 150.368,81.28 ; P1.0.6@150.065,81.067 cw(c150.368,80.957) 150.368,81.28 ; P1.0.6@150.065,81.493 ccw(c150.368,81.603) 150.368,81.28
P1.6: D7-1.2 Download.9 MCU.7 P1.0.7 | length 212.3
  Top Layer w0.254: D7-1.2@72.71,79.133 cw(c72.71,78.095) 73.444,78.829 ; D7-1.2@72.71,79.756 72.71,79.563 73.787,78.486 83.434,78.486 MCU.7@84.832,77.088 ; D7-1.2@72.979,79.656 ccw(c73.853,79.656) D7-1.2@73.235,79.038 ; D7-1.2@73.233,79.656 ccw(c74.72,79.656) 73.669,78.604 ; 83.708,78.212 cw(c82.615,77.119) MCU.7@84.161,77.094 ; 83.977,77.943 ccw(c84.532,78.499) MCU.7@84.532,77.713 ; 84.132,77.788 cw(c83.45,77.105) MCU.7@84.415,77.09 ; Download.9@96.587,112.716 cw(c95.524,111.653) 97.028,111.653 cw(c98.532,111.653) Download.9@97.469,112.716 ; v1@96.669,77.575 ccw(c95.802,78.442) 97.028,78.442 ccw(c98.254,78.442) v1@97.387,77.575 ; Download.9@96.767,112.896 cw(c96.137,112.266) 97.028,112.266 cw(c97.919,112.266) Download.9@97.289,112.896 ; v1(97.028,77.216) Download.9@97.028,113.157
  Bottom Layer w0.254: MCU.7@84.09,76.646 ccw(c83.022,75.578) 83.022,77.088 ccw(c83.022,78.598) MCU.7@84.09,77.53 ; MCU.7@84.27,76.825 ccw(c83.636,76.191) 83.636,77.088 ccw(c83.636,77.985) MCU.7@84.27,77.351 ; MCU.7@85.395,76.825 cw(c86.029,76.191) 86.029,77.088 cw(c86.029,77.985) MCU.7@85.395,77.351 ; MCU.7@85.574,76.646 cw(c86.642,75.578) 86.642,77.088 cw(c86.642,78.598) MCU.7@85.574,77.53 ; 95.493,77.088 ccw(c95.493,78.751) v1@96.669,77.575 ; 96.106,77.088 ccw(c96.106,78.138) v1@96.848,77.396 ; 96.111,77.088 cw(c96.111,76.299) v1@96.669,76.857 ; v1(97.028,77.216) 96.9,77.088 81.66,77.088 81.28,77.468 81.28,97.961 83.141,99.822 152.698,99.822 153.416,99.104 153.416,90.043 154.94,88.519 156.21,88.519 156.972,87.757 156.972,78.867 156.337,78.232 150.495,78.232 149.987,78.74 P1.0.7@149.479,78.74 ; P1.0.7@149.525,78.635 cw(c149.778,78.058) 150.224,78.503 ; P1.0.7@149.627,78.402 cw(c149.939,77.693) 150.486,78.241
P1.7: D8-1.2 Download.7 MCU.8 P1.0.8 | length 220.6
  Top Layer w0.254: D8-1.2@72.71,76.593 cw(c72.71,75.555) 73.444,76.289 ; D8-1.2@72.71,77.216 72.71,77.023 73.787,75.946 83.434,75.946 MCU.8@84.832,74.548 ; D8-1.2@72.979,77.116 ccw(c73.853,77.116) D8-1.2@73.235,76.498 ; D8-1.2@73.233,77.116 ccw(c74.72,77.116) 73.669,76.064 ; 83.708,75.672 cw(c82.615,74.579) MCU.8@84.161,74.554 ; 83.977,75.403 ccw(c84.532,75.959) MCU.8@84.532,75.173 ; 84.132,75.248 cw(c83.45,74.565) MCU.8@84.415,74.55 ; Download.7@94.047,112.716 cw(c92.984,111.653) 94.488,111.653 cw(c95.992,111.653) Download.7@94.929,112.716 ; v1@94.129,75.035 ccw(c93.262,75.902) 94.488,75.902 ccw(c95.714,75.902) v1@94.847,75.035 ; Download.7@94.227,112.896 cw(c93.597,112.266) 94.488,112.266 cw(c95.379,112.266) Download.7@94.749,112.896 ; v1(94.488,74.676) Download.7@94.488,113.157
  Bottom Layer w0.254: MCU.8@84.09,74.106 ccw(c83.022,73.038) 83.022,74.548 ccw(c83.022,76.058) MCU.8@84.09,74.99 ; MCU.8@84.27,74.285 ccw(c83.636,73.651) 83.636,74.548 ccw(c83.636,75.445) MCU.8@84.27,74.811 ; MCU.8@85.395,74.285 cw(c86.029,73.651) 86.029,74.548 cw(c86.029,75.445) MCU.8@85.395,74.811 ; MCU.8@85.574,74.106 cw(c86.642,73.038) 86.642,74.548 cw(c86.642,76.058) MCU.8@85.574,74.99 ; 92.953,74.548 ccw(c92.953,76.211) v1@94.129,75.035 ; 93.566,74.548 ccw(c93.566,75.598) v1@94.308,74.856 ; 93.571,74.548 cw(c93.571,73.759) v1@94.129,74.317 ; v1(94.488,74.676) 94.36,74.548 81.662,74.548 80.772,75.438 80.772,98.171 82.931,100.33 152.908,100.33 153.924,99.314 153.924,91.694 154.559,91.059 156.591,91.059 157.48,90.17 157.48,75.819 157.353,75.692 150.495,75.692 149.987,76.2 P1.0.8@149.479,76.2 ; P1.0.8@149.525,76.095 cw(c149.778,75.518) 150.224,75.963 ; P1.0.8@149.627,75.862 cw(c149.939,75.153) 150.486,75.701
P2.0: D1-2.2 MCU.21 P2.0.1@138.684,49.784 P2.0.2@116.355,42.331 | length 104.6
  Top Layer w0.254: MCU.21@100.076,43.815 103.759,43.815 108.077,48.133 108.077,51.181 108.966,52.07 D1-2.2@110.368,52.07 ; MCU.21@100.639,43.552 cw(c101.273,42.918) 101.273,43.815 cw(c101.273,44.712) MCU.21@100.639,44.078 ; MCU.21@100.818,43.373 cw(c101.886,42.305) 101.886,43.815 cw(c101.886,45.325) MCU.21@100.818,44.257 ; D1-2.2@109.998,51.7 ccw(c109.105,50.807) 109.105,52.07 ccw(c109.105,53.333) D1-2.2@109.998,52.44 ; P2.0.2@116.355,42.331 117.769,42.331 ; P2.0.2@117.126,41.975 cw(c117.769,41.573) 117.769,42.331 ; P2.0.2@117.126,42.688 ccw(c117.769,43.09) 117.769,42.331 ; P2.0.1@138.243,49.343 cw(c137.18,48.28) 138.684,48.28 cw(c140.188,48.28) P2.0.1@139.125,49.343 ; P2.0.1@138.423,49.523 cw(c137.793,48.893) 138.684,48.893 cw(c139.575,48.893) P2.0.1@138.945,49.523 ; P2.0.1@138.684,49.784 138.684,46.101 138.43,45.847 121.285,45.847 117.769,42.331
  Bottom Layer w0.254: MCU.21@100.076,43.815 104.267,43.815 108.331,47.879 108.331,49.657 109.474,50.8 121.539,50.8 122.555,49.784 P2.0.1@138.684,49.784 ; MCU.21@100.639,43.552 cw(c101.273,42.918) 101.273,43.815 cw(c101.273,44.712) MCU.21@100.639,44.078 ; MCU.21@100.818,43.373 cw(c101.886,42.305) 101.886,43.815 cw(c101.886,45.325) MCU.21@100.818,44.257 ; P2.0.1@138.243,49.343 ccw(c137.18,48.28) 137.18,49.784 ccw(c137.18,51.288) P2.0.1@138.243,50.225 ; P2.0.1@138.423,49.523 ccw(c137.793,48.893) 137.793,49.784 ccw(c137.793,50.675) P2.0.1@138.423,50.045
P2.1: D2-2.2 MCU.22 P2.0.2@138.684,52.324 P2.1.2 | length 98.3
  Top Layer w0.254: MCU.22@100.076,46.355 103.378,46.355 107.315,50.292 107.315,53.848 108.077,54.61 D2-2.2@110.368,54.61 ; MCU.22@100.639,46.092 cw(c101.273,45.458) 101.273,46.355 cw(c101.273,47.252) MCU.22@100.639,46.618 ; MCU.22@100.818,45.913 cw(c101.886,44.845) 101.886,46.355 cw(c101.886,47.865) MCU.22@100.818,46.797 ; D2-2.2@109.998,54.24 ccw(c109.105,53.347) 109.105,54.61 ccw(c109.105,55.873) D2-2.2@109.998,54.98 ; P2.1.2@127.531,42.331 129.072,42.331 ; P2.1.2@128.067,42.081 cw(c128.566,41.709) 128.566,42.331 cw(c128.566,42.954) P2.1.2@128.067,42.582 ; P2.1.2@128.271,41.929 cw(c129.072,41.331) 129.072,42.331 ; P2.1.2@128.271,42.733 ccw(c129.072,43.331) 129.072,42.331 ; P2.0.2@138.684,52.324 140.081,52.324 ; P2.0.2@138.959,52.077 cw(c139.511,51.581) 139.511,52.324 cw(c139.511,53.067) P2.0.2@138.959,52.571 ; P2.0.2@139.148,51.908 cw(c140.081,51.069) 140.081,52.324 ; P2.0.2@139.148,52.74 ccw(c140.081,53.579) 140.081,52.324 ; 129.072,42.331 132.08,45.339 139.573,45.339 140.716,46.482 140.716,51.689 140.081,52.324
  Bottom Layer w0.254: MCU.22@100.076,46.355 102.997,46.355 108.585,51.943 108.585,53.086 108.966,53.467 136.398,53.467 137.541,52.324 ; MCU.22@100.639,46.092 cw(c101.273,45.458) 101.273,46.355 cw(c101.273,47.252) MCU.22@100.639,46.618 ; MCU.22@100.818,45.913 cw(c101.886,44.845) 101.886,46.355 cw(c101.886,47.865) MCU.22@100.818,46.797 ; P2.0.2@138.16,51.986 ccw(c137.541,51.587) 137.541,52.324 ; P2.0.2@138.16,52.662 cw(c137.541,53.061) 137.541,52.324 ; P2.0.2@138.684,52.324 137.541,52.324